# Altium PCB GateWay V1.1.PcbDoc (part 2 of 3)
Units mil, origin at the board's own origin, x right, y up, seen from the top; angles counter-clockwise.
Board outline 3543.31 x 4133.86 mil, 2 copper layers (Top Layer, Bottom Layer); 174 components, 139 nets, 614 pads, 376 vias.
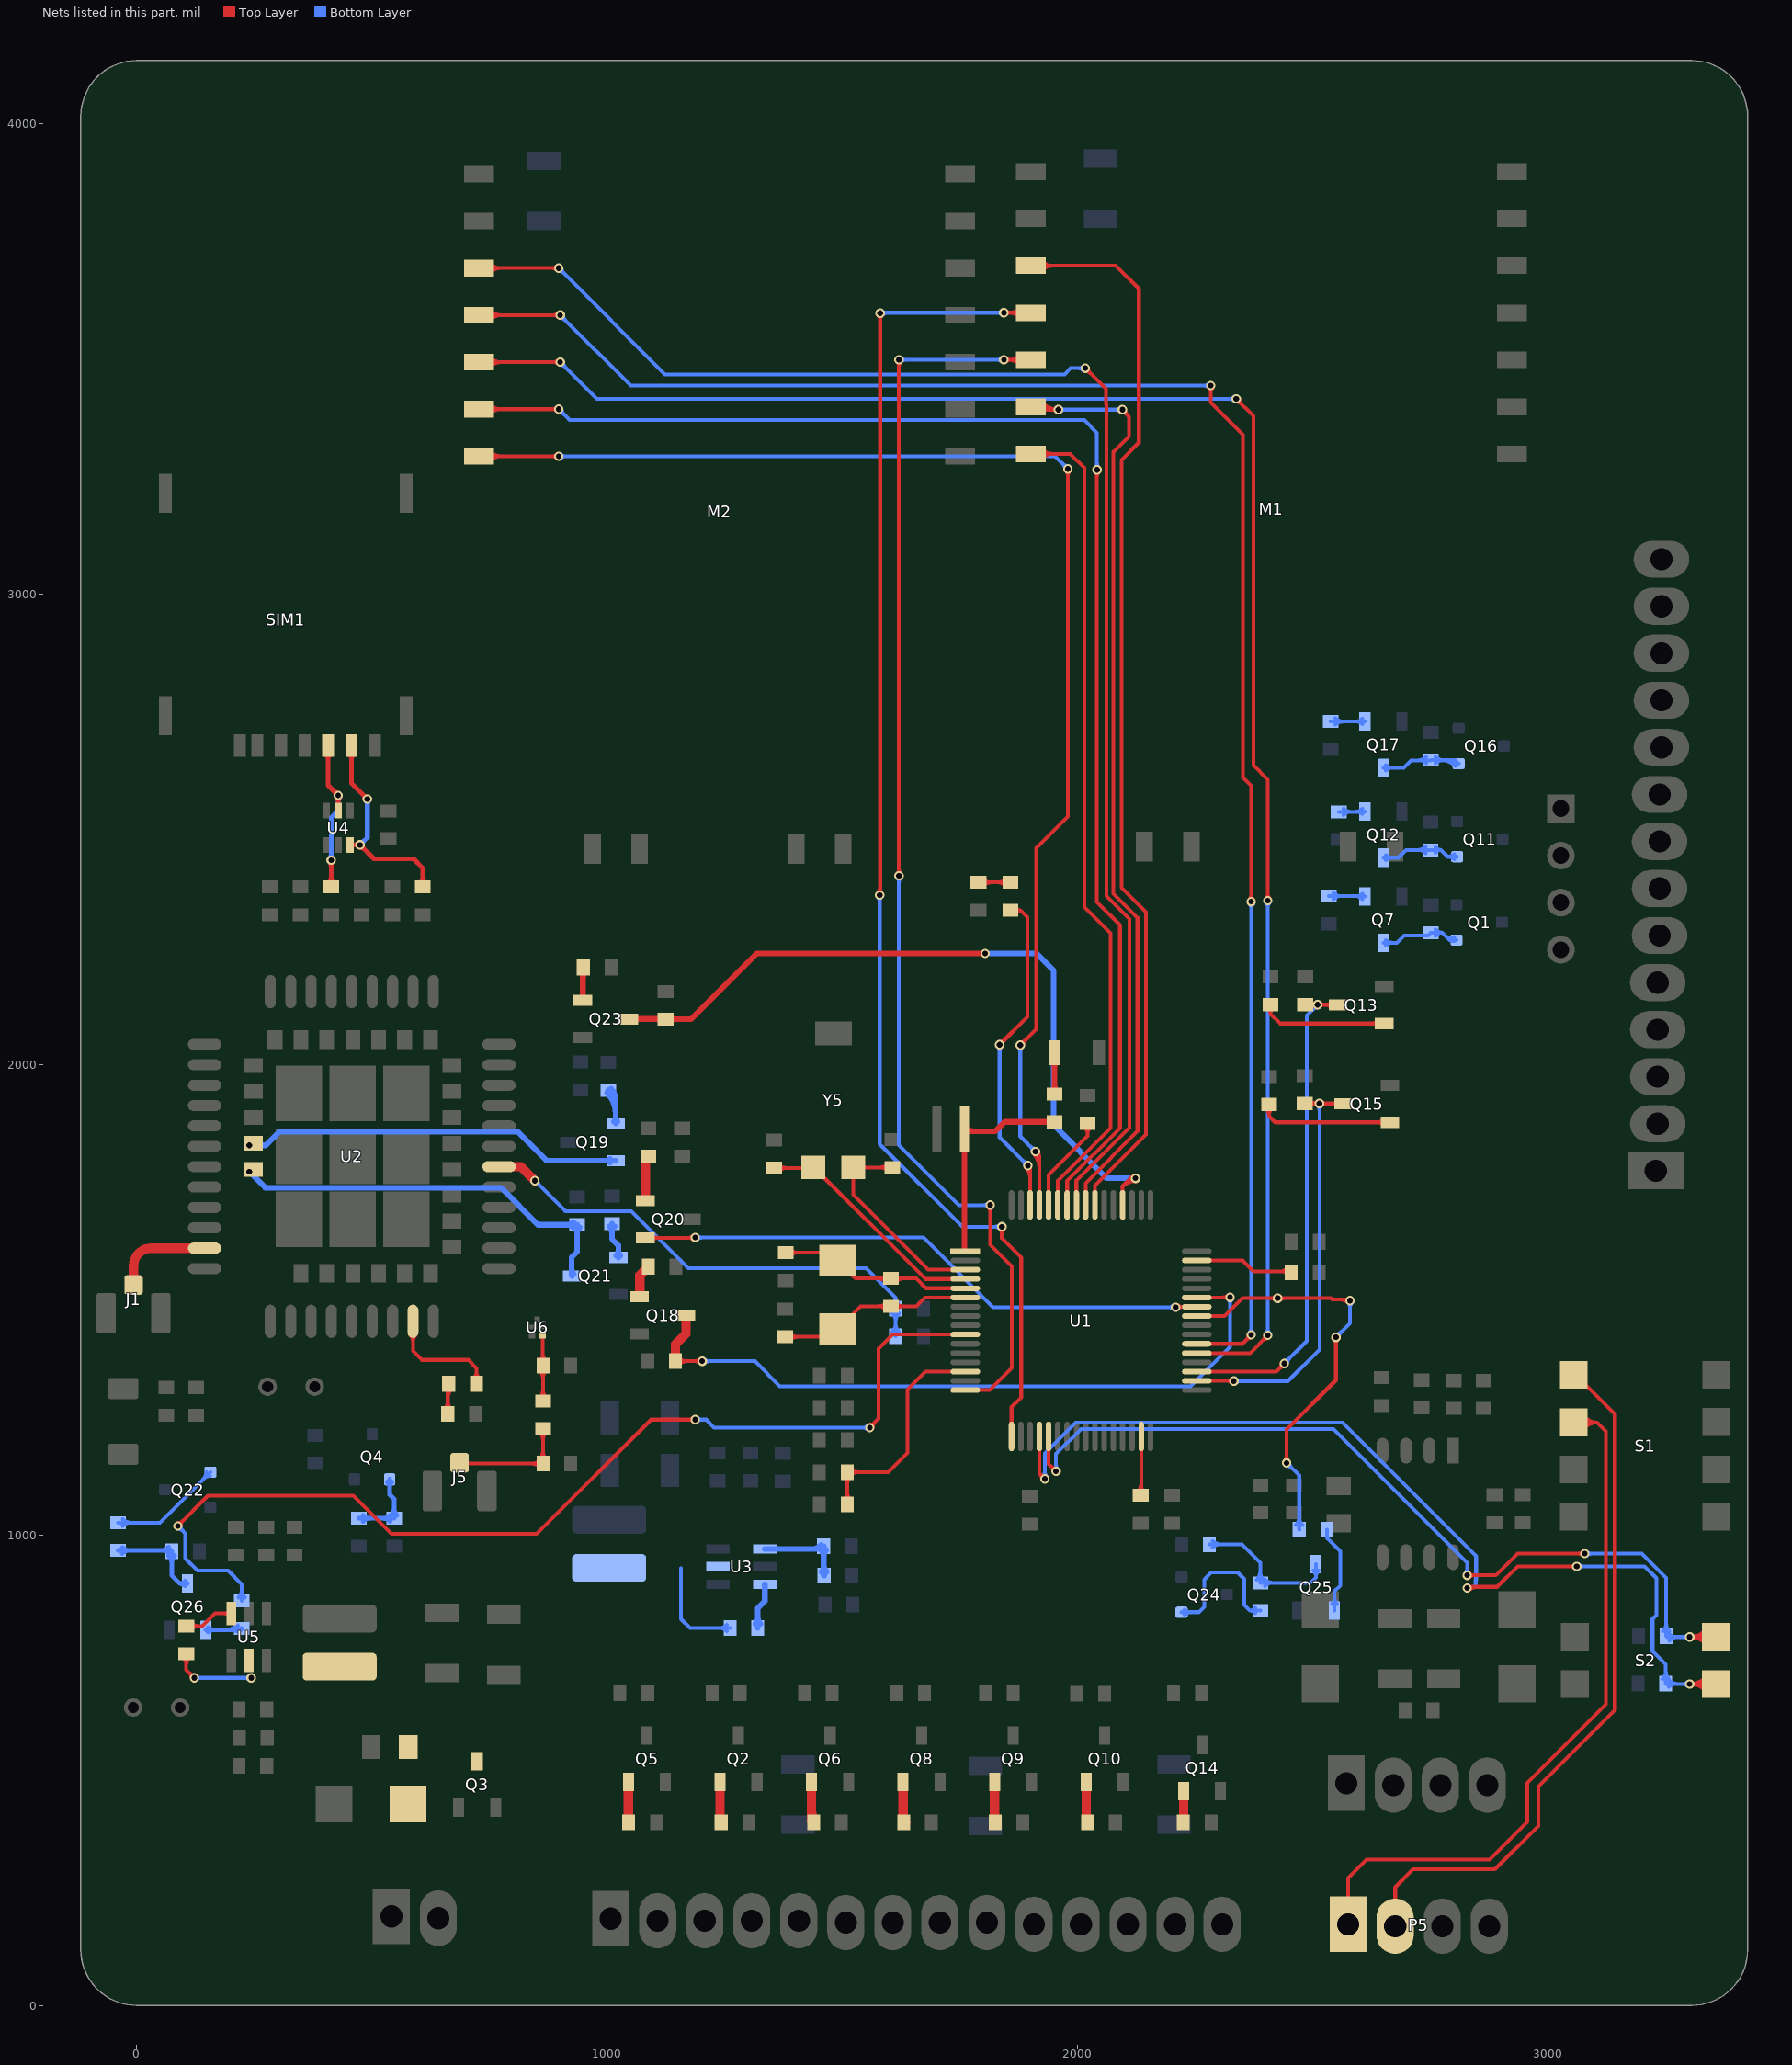
[diagram p2: the nets of this part, all layers, seen from the top]

## Via types
v1: diameter 30, hole 20, Top Layer to Bottom Layer, tented both sides, 218 vias
v2: diameter 20, hole 12, Top Layer to Bottom Layer, tented both sides, 150 vias
v3: diameter 40, hole 25, Top Layer to Bottom Layer, tented both sides, 8 vias

## Nets (pads, with @x,y where several pads share a name; then routed paths per layer and width w, separated by ;. In a path a pad name is that pad's centre, name@x,y a point inside that pad or via, vN(x,y) a via of type N, cw(c..) or ccw(c..) an arc to the next point about the centre after c; other vN are vias at no path point) (continued)
CTRL3OUT21: Q15.3 R28.1 U1.34 | length 1074.6
  Top Layer w8: U1.34@2254.13,1327.41 v2@2332.59,1327.41 ; 2317.53,1327.41 cw(c2317.53,1311.53) v2@2328.76,1322.76 ; 2319.5,1327.41 ccw(c2319.5,1340.5) v2@2328.76,1331.24 ; R28.1@2483.68,1917 v2(2515,1917) 2565.57,1917 Q15.3@2566.26,1916.32 ; R28.1@2493.55,1910.08 cw(c2510.25,1893.39) 2510.25,1917 cw(c2510.25,1940.61) R28.1@2493.55,1923.92 ; v2@2510.76,1912.76 ccw(c2500.51,1902.51) 2500.51,1917 ccw(c2500.51,1931.49) v2@2510.76,1921.24 ; v2@2519.24,1912.76 cw(c2529.49,1902.51) 2529.49,1917 cw(c2529.49,1931.49) v2@2519.24,1921.24 ; 2537.87,1917 cw(c2537.87,1895.8) Q15.3@2552.86,1910.79 ; 2541.18,1917 ccw(c2541.18,1933.52) Q15.3@2552.86,1921.84
  Bottom Layer w8: v2(2333,1327) 2448,1327 2515,1394 v2(2515,1917) ; v2@2337.24,1322.76 cw(c2347.49,1312.51) 2347.49,1327 cw(c2347.49,1341.49) v2@2337.24,1331.24 ; v2@2510.76,1912.76 cw(c2500.51,1902.51) 2515,1902.51 cw(c2529.49,1902.51) v2@2519.24,1912.76
CTRL3OUT31: Q13.3 R22.1 U1.35 | length 1235.6
  Top Layer w8: U1.35@2254.13,1347.09 2423.09,1347.09 v2(2440.26,1364.26) ; v2@2434.26,1364.26 cw(c2419.77,1364.26) 2430.02,1354.02 cw(c2440.26,1343.77) v2@2440.26,1358.26 ; R22.1@2484.68,2127 2553.63,2127 Q13.3@2554.26,2126.37 ; R22.1@2494.55,2120.08 cw(c2511.25,2103.39) 2511.25,2127 cw(c2511.25,2150.61) R22.1@2494.55,2133.92 ; v2@2506.76,2122.76 ccw(c2496.51,2112.51) 2496.51,2127 ccw(c2496.51,2141.49) v2@2506.76,2131.24 ; v2@2515.24,2122.76 cw(c2525.49,2112.51) 2525.49,2127 cw(c2525.49,2141.49) v2@2515.24,2131.24 ; 2526.01,2127 cw(c2526.01,2105.99) Q13.3@2540.86,2120.85 ; 2529.05,2127 ccw(c2529.05,2143.71) Q13.3@2540.86,2131.89
  Bottom Layer w8: v2(2440.26,1364.26) 2488,1412 2488,2104 v2(2511,2127) ; v2@2440.26,1370.26 ccw(c2440.26,1384.74) 2450.5,1374.5 ccw(c2460.74,1364.26) v2@2446.26,1364.26 ; v2@2505,2127 cw(c2490.51,2127) 2500.76,2116.76 cw(c2511,2106.51) v2@2511,2121
DTR: R59.2 R60.1 U2.6 | length 1282
  Top Layer w20: U2.6@770.98,1782.73 817.28,1782.73 v2(847,1753)
  Bottom Layer w8: v2@847,1747 cw(c847,1732.51) 857.24,1742.76 cw(c867.49,1753) v2@853,1753 ; v2(847,1753) 912,1688 1052,1688 1173,1567 1385,1567 1551,1567 1614,1504 ; R60.1@1607.98,1491.66 ccw(c1598.34,1504) 1614,1504 ; R59.2@1613.94,1422 1614,1422.06 R60.1@1614,1481 ; 1614,1439 1614,1504 ; R60.1@1620.02,1491.66 cw(c1629.66,1504) 1614,1504 ; 1614,1454.44 cw(c1637.61,1454.44) 1620.92,1471.13 ccw(c1637.61,1454.44) 1614,1454.44 ; 1614,1454.44 ccw(c1590.39,1454.44) 1607.08,1471.13 cw(c1590.39,1454.44) 1614,1454.44 ; R59.2@1607.03,1431.87 ccw(c1590.2,1448.7) 1614,1448.7 cw(c1590.2,1448.7) R59.2@1607.03,1431.87 ; 1614,1448.43 ccw(c1637.42,1448.43) 1620.86,1431.87 cw(c1637.42,1448.43) 1614,1448.43
EN_3.3V: R67.2 U1.10 | length 2437.9
  Top Layer w8: v2(88,1019) 152,1083 461.19,1083 542.19,1002 851,1002 1094,1245 v2(1188,1245) ; v2@88,1025 ccw(c88,1039.49) 98.24,1029.24 ccw(c108.49,1019) v2@94,1019 ; v2@1183.76,1240.76 ccw(c1173.51,1230.51) 1173.51,1245 ccw(c1173.51,1259.49) v2@1183.76,1249.24 ; v2(1559,1228) 1578,1247 1578,1396 1607.83,1425.83 U1.10@1762,1425.83 ; v2@1559,1234 ccw(c1559,1248.49) 1569.24,1238.24 ccw(c1579.49,1228) v2@1565,1228
  Bottom Layer w8: v2@88,1013 cw(c88,998.51) 98.24,1008.76 cw(c108.49,1019) v2@94,1019 ; v2(88,1019) 104,1003 104,950 130,924 195,924 224,895 R67.2@224,860.06 ; R67.2@217.08,866.97 ccw(c200.39,883.66) 224,883.66 ccw(c247.61,883.66) R67.2@230.92,866.97 ; v2(1188,1245) 1211,1245 1228,1228 v2(1559,1228) ; v2@1192.24,1240.76 cw(c1202.49,1230.51) 1202.49,1245 cw(c1202.49,1259.49) v2@1192.24,1249.24 ; v2@1554.76,1223.76 ccw(c1544.51,1213.51) 1544.51,1228 ccw(c1544.51,1242.49) v2@1554.76,1232.24
EN_5V: R63.2 U1.41 | length 1116.4
  Top Layer w8: U1.41@2254.13,1465.2 2313.2,1465.2 2351,1503 v2(2426,1503) 2539,1503 2542,1500 2578,1500 v2(2580,1498) ; v2@2421.76,1498.76 ccw(c2411.51,1488.51) 2411.51,1503 ccw(c2411.51,1517.49) v2@2421.76,1507.24 ; v2@2430.24,1498.76 cw(c2440.49,1488.51) 2440.49,1503 cw(c2440.49,1517.49) v2@2430.24,1507.24 ; v2@2440.76,1157.24 ccw(c2430.51,1167.49) 2445,1167.49 ccw(c2459.49,1167.49) v2@2449.24,1157.24 ; v2(2445,1153) 2445,1224 2550,1329 v2(2550,1420) ; v2@2545.76,1415.76 cw(c2535.51,1405.51) 2550,1405.51 cw(c2564.49,1405.51) v2@2554.24,1415.76 ; 2560.69,1500 cw(c2560.69,1478.69) v2@2575.76,1493.76
  Bottom Layer w8: v2(2426,1503) v2@2430,1507 ; v2@2445,1147 cw(c2445,1132.51) 2455.24,1142.76 cw(c2465.49,1153) v2@2451,1153 ; v2(2445,1153) 2471.94,1126.06 R63.2@2471.94,1011 ; R63.2@2465.03,1020.87 ccw(c2448.33,1037.56) 2471.94,1037.56 ccw(c2495.55,1037.56) R63.2@2478.86,1020.87 ; v2(2550,1420) 2580,1450 v2(2580,1498) ; v2@2550,1426 ccw(c2550,1440.49) 2560.24,1430.24 ccw(c2570.49,1420) v2@2556,1420 ; v2@2575.76,1493.76 cw(c2565.51,1483.51) 2580,1483.51 cw(c2594.49,1483.51) v2@2584.24,1493.76
GPS_RXD: Q21.3 R47.1 U2.62 | length 931
  Bottom Layer w12: v2(240,1772) 274,1738 775,1738 853.81,1659.19 R47.1@936.98,1659.19 936.98,1601.98 925,1590 925,1551.42 Q21.3@926.1,1550.32 ; 925,1567.01 ccw(c942.79,1567.01) Q21.3@930.21,1554.43 ; R47.1@928.52,1653.69 ccw(c915.24,1640.41) 915.24,1659.19 ccw(c915.24,1677.97) R47.1@928.52,1664.69 ; R47.1@931.48,1653.69 cw(c918.19,1640.41) 936.98,1640.41 cw(c955.76,1640.41) R47.1@942.48,1653.69
GPS_TXD: Q19.2 U2.61 | length 838.5
  Bottom Layer w12: v2(240,1828) 275,1828 304,1857 810,1857 871.55,1795.45 Q19.2@1018.98,1795.45 ; Q19.2@1006.99,1791.34 ccw(c997.07,1781.42) 997.07,1795.45 ccw(c997.07,1809.48) Q19.2@1006.99,1799.56
LORA_AUX: M1.5 U1.55 | length 2341.9
  Top Layer w8: M1.5@1901.25,3697.9 2082,3697.9 2131,3648.9 2131,3322 2094,3285 2094,2376 2146,2324 2146,1851 2058,1763 ; M1.5@1924.73,3688.2 cw(c1948.15,3664.78) 1948.15,3697.9 cw(c1948.15,3731.01) M1.5@1924.73,3707.6 ; U1.55@2037.59,1701.43 2037.59,1742.59 2058,1763 ; 2050.5,1755.5 2058,1763
LORA_AUX2: M2.5 U1.57 | length 3395
  Top Layer w8: M2.5@728.25,3692.9 v2(897.9,3692.9) ; M2.5@751.73,3683.2 cw(c775.15,3659.78) 775.15,3692.9 cw(c775.15,3726.01) M2.5@751.73,3702.6 ; v2@893.65,3688.65 ccw(c883.41,3678.41) 883.41,3692.9 ccw(c883.41,3707.38) v2@893.65,3697.14 ; U1.57@1998.22,1701.43 1998.22,1753.22 2111,1866 2111,2309 2062,2358 2062,3403 2061,3404 2061,3436 v2(2017,3480) ; v2@2017,3474 cw(c2017,3459.51) 2027.24,3469.76 cw(c2037.49,3480) v2@2023,3480
  Bottom Layer w8: v2@897.9,3686.9 cw(c897.9,3672.41) 908.14,3682.65 cw(c918.38,3692.9) v2@903.9,3692.9 ; v2(897.9,3692.9) 1123.8,3467 1973,3467 1986,3480 v2(2017,3480) ; v2@2012.76,3475.76 ccw(c2002.51,3465.51) 2002.51,3480 ccw(c2002.51,3494.49) v2@2012.76,3484.24
LORA_M0: M1.1 U1.59 | length 1814.4
  Top Layer w8: M1.1@1901.25,3297.9 1985.1,3297.9 2015,3268 2015,2335 2071,2279 2071,1865 1958.85,1752.85 U1.59@1958.85,1701.43 ; M1.1@1924.73,3288.2 cw(c1948.15,3264.78) 1948.15,3297.9 cw(c1948.15,3331.01) M1.1@1924.73,3307.6
LORA_M1: M1.2 U1.56 | length 2139.2
  Top Layer w8: M1.2@1901.25,3397.9 1907.15,3392 v2(1960,3392) cw(c1960,3439.63) M1.2@1925.08,3407.23 ; M1.2@1919.22,3401.79 ccw(c1941.66,3422.61) 1941.66,3392 ; M1.2@1924.73,3388.2 cw(c1933.91,3379.02) 1933.91,3392 ; v2@1955.76,3387.76 ccw(c1945.51,3377.51) 1945.51,3392 ccw(c1945.51,3406.49) v2@1955.76,3396.24 ; U1.56@2017.91,1701.43 2017.91,1747.91 2128,1858 2128,2312 2077,2363 2077,3302 2109.95,3334.95 2109.95,3377.05 v2@2095.5,3391.5 ; v2@2096,3386 cw(c2096,3373.93) 2104.54,3382.46 ; v2@2102,3392 ccw(c2118.9,3392) 2106.95,3380.05
  Bottom Layer w8: v2(1960,3392) v2(2096,3392) ; v2@1964.24,3387.76 cw(c1974.49,3377.51) 1974.49,3392 cw(c1974.49,3406.49) v2@1964.24,3396.24 ; v2@2091.76,3387.76 ccw(c2081.51,3377.51) 2081.51,3392 ccw(c2081.51,3406.49) v2@2091.76,3396.24
LORA_M02: M2.1 U1.61 | length 3150
  Top Layer w8: M2.1@728.25,3292.9 v2(897.9,3292.9) v2@898,3293 ; M2.1@751.73,3283.2 cw(c775.15,3259.78) 775.15,3292.9 cw(c775.15,3326.01) M2.1@751.73,3302.6 ; v2@893.65,3288.65 ccw(c883.41,3278.41) 883.41,3292.9 ccw(c883.41,3307.38) v2@893.65,3297.14 ; v2(1879,2041) 1913,2075 1913,2460 1980,2527 v2(1980,3266) ; v2@1879,2047 ccw(c1879,2061.49) 1889.24,2051.24 ccw(c1899.49,2041) v2@1885,2041 ; v2@1906.87,1810.65 cw(c1876.42,1780.2) 1919.48,1780.2 ; v2(1911.11,1814.89) 1919.48,1806.52 U1.61@1919.48,1701.43 ; v2@1912.53,1816.3 cw(c1895.74,1799.51) 1919.48,1799.51 ; v2@1975.76,3261.76 cw(c1965.51,3251.51) 1980,3251.51 cw(c1994.49,3251.51) v2@1984.24,3261.76
  Bottom Layer w8: v2(897.9,3292.9) 1953.1,3292.9 v2(1980,3266) ; v2@902.14,3288.65 cw(c912.38,3278.41) 912.38,3292.9 cw(c912.38,3307.38) v2@902.14,3297.14 ; v2@1874.76,2036.76 cw(c1864.51,2026.51) 1879,2026.51 cw(c1893.49,2026.51) v2@1883.24,2036.76 ; v2(1879,2041) 1879,1847 v2(1911.11,1814.89) ; v2@1905.11,1814.89 ccw(c1890.63,1814.89) 1900.87,1825.13 ccw(c1911.11,1835.37) v2@1911.11,1820.89 ; v2@1974,3266 ccw(c1959.51,3266) 1969.76,3276.24 ccw(c1980,3286.49) v2@1980,3272
LORA_M12: M2.2 U1.58 | length 3186
  Top Layer w8: M2.2@728.25,3392.9 v2(897.9,3392.9) v2@898,3393 ; M2.2@751.73,3383.2 cw(c775.15,3359.78) 775.15,3392.9 cw(c775.15,3426.01) M2.2@751.73,3402.6 ; v2@893.65,3388.65 ccw(c883.41,3378.41) 883.41,3392.9 ccw(c883.41,3407.38) v2@893.65,3397.14 ; U1.58@1978.54,1701.43 1978.54,1752.54 2091,1865 2091,2296 2042,2345 v2(2042,3264) ; v2@2037.76,3259.76 cw(c2027.51,3249.51) 2042,3249.51 cw(c2056.49,3249.51) v2@2046.24,3259.76
  Bottom Layer w8: v2@897.9,3386.9 cw(c897.9,3372.41) 908.14,3382.65 cw(c918.38,3392.9) v2@903.9,3392.9 ; v2(897.9,3392.9) 920.8,3370 2015,3370 2042,3343 v2(2042,3264) ; v2@2037.76,3268.24 ccw(c2027.51,3278.49) 2042,3278.49 ccw(c2056.49,3278.49) v2@2046.24,3268.24
LORA_RXD: M1.3 U1.16 | length 2914
  Top Layer w8: v2@1616.76,2405.24 ccw(c1606.51,2415.49) 1621,2415.49 ccw(c1635.49,2415.49) v2@1625.24,2405.24 ; v2@1616.76,3493.76 cw(c1606.51,3483.51) 1621,3483.51 cw(c1635.49,3483.51) v2@1625.24,3493.76 ; v2(1621,2401) v2(1621,3498) ; U1.16@1762,1307.72 1813.72,1307.72 1861,1355 1861,1571 1815,1617 v2(1815,1701) ; v2@1810.76,1696.76 cw(c1800.51,1686.51) 1815,1686.51 cw(c1829.49,1686.51) v2@1819.24,1696.76 ; v2(1844,3498) 1844.1,3497.9 M1.3@1901.25,3497.9 ; v2@1848.24,3493.76 cw(c1858.24,3483.76) 1858.24,3497.9 ; v2@1848.24,3502.24 ccw(c1858.73,3512.73) 1858.73,3497.9 ; M1.3@1877.77,3488.2 ccw(c1854.36,3464.78) 1854.36,3497.9 ccw(c1854.36,3531.01) M1.3@1877.77,3507.6
  Bottom Layer w8: v2@1616.76,2396.76 cw(c1606.51,2386.51) 1621,2386.51 cw(c1635.49,2386.51) v2@1625.24,2396.76 ; v2(1621,2401) 1621,1829 1749,1701 v2(1815,1701) ; v2(1621,3498) v2(1844,3498) ; v2@1625.24,3493.76 cw(c1635.49,3483.51) 1635.49,3498 cw(c1635.49,3512.49) v2@1625.24,3502.24 ; v2@1810.76,1696.76 ccw(c1800.51,1686.51) 1800.51,1701 ccw(c1800.51,1715.49) v2@1810.76,1705.24 ; v2@1839.76,3493.76 ccw(c1829.51,3483.51) 1829.51,3498 ccw(c1829.51,3512.49) v2@1839.76,3502.24
LORA_RXD2: M2.3 U1.37 | length 4061.2
  Top Layer w8: M2.3@728.25,3492.9 v2@900.9,3492.9 ; M2.3@751.73,3483.2 cw(c775.15,3459.78) 775.15,3492.9 cw(c775.15,3526.01) M2.3@751.73,3502.6 ; 886.27,3492.9 ccw(c886.27,3507.73) v2@896.76,3497.24 ; 886.76,3492.9 cw(c886.76,3478.76) v2@896.76,3488.76 ; U1.37@2254.13,1386.46 2367.46,1386.46 v2(2405,1424) ; v2@2338,3409 cw(c2338,3394.51) 2348.24,3404.76 cw(c2358.49,3415) v2@2344,3415 ; v2(2338,3415) 2374.53,3378.47 2374.53,2636 2405,2605.53 v2(2405,2348) ; v2@2399,1424 cw(c2384.51,1424) 2394.76,1413.76 cw(c2405,1403.51) v2@2405,1418 ; v2@2400.76,2352.24 ccw(c2390.51,2362.49) 2405,2362.49 ccw(c2419.49,2362.49) v2@2409.24,2352.24
  Bottom Layer w8: v2@901,3487 cw(c901,3472.51) 911.24,3482.76 cw(c921.49,3493) v2@907,3493 ; v2(901,3493) 979,3415 v2(2338,3415) ; v2@2333.76,3410.76 ccw(c2323.51,3400.51) 2323.51,3415 ccw(c2323.51,3429.49) v2@2333.76,3419.24 ; v2@2400.76,1428.24 ccw(c2390.51,1438.49) 2405,1438.49 ccw(c2419.49,1438.49) v2@2409.24,1428.24 ; v2@2400.76,2343.76 cw(c2390.51,2333.51) 2405,2333.51 cw(c2419.49,2333.51) v2@2409.24,2343.76 ; v2(2405,1424) v2(2405,2348)
LORA_TXD: M1.4 U1.17 | length 3125.3
  Top Layer w8: v2@1575.76,2364.24 ccw(c1563.1,2376.9) 1581,2376.9 ; v2@1576.76,3592.76 cw(c1566.51,3582.51) 1581,3582.51 cw(c1595.49,3582.51) v2@1585.24,3592.76 ; v2(1580,2360) 1581,2361 v2(1581,3597) ; 1581,2372.07 ccw(c1592.07,2372.07) v2@1584.24,2364.24 ; v2@1835.76,1650.76 cw(c1825.51,1640.51) 1840,1640.51 cw(c1854.49,1640.51) v2@1844.24,1650.76 ; v2(1840,1655) 1840,1630 1881,1589 1881,1492.55 1881,1292.57 1860.43,1272 U1.17@1860.43,1209.3 ; v2(1844,3598) 1844.1,3597.9 M1.4@1901.25,3597.9 ; v2@1848.24,3593.76 cw(c1858.24,3583.76) 1858.24,3597.9 ; v2@1848.24,3602.24 ccw(c1858.73,3612.73) 1858.73,3597.9 ; M1.4@1877.77,3588.2 ccw(c1854.36,3564.78) 1854.36,3597.9 ccw(c1854.36,3631.01) M1.4@1877.77,3607.6
  Bottom Layer w8: v2@1575.76,2355.76 cw(c1565.51,2345.51) 1580,2345.51 cw(c1594.49,2345.51) v2@1584.24,2355.76 ; v2(1580,2360) 1580,1831 1756,1655 v2(1840,1655) ; v2(1581,3597) 1582,3598 v2(1844,3598) ; v2@1585.24,3592.76 cw(c1597.9,3580.1) 1597.9,3598 ; v2@1585.24,3601.24 ccw(c1593.07,3609.07) 1593.07,3598 ; v2@1835.76,1650.76 ccw(c1825.51,1640.51) 1825.51,1655 ccw(c1825.51,1669.49) v2@1835.76,1659.24 ; v2@1839.76,3593.76 ccw(c1829.51,3583.51) 1829.51,3598 ccw(c1829.51,3612.49) v2@1839.76,3602.24
LORA_TXD2: M2.4 U1.38 | length 4034.8
  Top Layer w8: M2.4@728.25,3592.9 v2@900.9,3592.9 ; M2.4@751.73,3583.2 cw(c775.15,3559.78) 775.15,3592.9 cw(c775.15,3626.01) M2.4@751.73,3602.6 ; 886.27,3592.9 ccw(c886.27,3607.73) v2@896.76,3597.24 ; 886.76,3592.9 cw(c886.76,3578.76) v2@896.76,3588.76 ; U1.38@2254.13,1406.15 2351.15,1406.15 v2(2370,1425) ; v2@2279.76,3438.76 cw(c2269.51,3428.51) 2284,3428.51 cw(c2298.49,3428.51) v2@2288.24,3438.76 ; v2(2284,3443) 2284,3407 2352,3339 2352,2610 2370,2592 v2(2370,2346) v2@2374,2350 ; v2@2364,1425 cw(c2349.51,1425) 2359.76,1414.76 cw(c2370,1404.51) v2@2370,1419 ; v2@2365.76,2350.24 ccw(c2355.51,2360.49) 2370,2360.49 ccw(c2384.49,2360.49) v2@2374.24,2350.24
  Bottom Layer w8: v2@901,3587 cw(c901,3572.51) 911.24,3582.76 cw(c921.49,3593) v2@907,3593 ; v2(901,3593) 1051,3443 v2(2284,3443) ; v2@2279.76,3438.76 ccw(c2269.51,3428.51) 2269.51,3443 ccw(c2269.51,3457.49) v2@2279.76,3447.24 ; v2@2365.76,1429.24 ccw(c2355.51,1439.49) 2370,1439.49 ccw(c2384.49,1439.49) v2@2374.24,1429.24 ; v2@2365.76,2341.76 cw(c2355.51,2331.51) 2370,2331.51 cw(c2384.49,2331.51) v2@2374.24,2341.76 ; v2(2370,1425) v2(2370,2346)
MODE1: R57.1 S2.3 U1.20 | length 2480
  Top Layer w8: U1.20@1919.48,1209.3 1919.48,1130.52 v2(1931,1119) ; v2@1925,1119 ccw(c1910.51,1119) 1920.76,1129.24 ccw(c1931,1139.49) v2@1931,1125 ; v2(2829,887) 2831.37,889.37 2892.37,889.37 2936,933 v2(3062,933) ; v2@2833.24,882.76 cw(c2849.21,866.79) 2849.21,889.37 ; v2@3057.76,928.76 ccw(c3047.51,918.51) 3047.51,933 ccw(c3047.51,947.49) v2@3057.76,937.24 ; v2@3306.24,678.76 cw(c3316.49,668.51) 3316.49,683 cw(c3316.49,697.49) v2@3306.24,687.24 ; S2.3@3338.73,666.26 ccw(c3302,634.35) v2(3302,683) ; S2.3@3338.73,699.74 cw(c3302,731.65) v2(3302,683) ; S2.3@3344.77,671.5 ccw(c3319.55,649.59) 3319.55,683 ccw(c3319.55,716.41) S2.3@3344.77,694.5 ; S2.3@3358,683 v2(3302,683)
  Bottom Layer w8: v2@1926.76,1123.24 ccw(c1916.51,1133.49) 1931,1133.49 ccw(c1945.49,1133.49) v2@1935.24,1123.24 ; v2(1931,1119) 1931,1173 1997,1239 2174,1239 ; 2200,1239 2174,1239 ; v2(2829,887) 2840,887 ; v2@2834.04,883.75 cw(c2840,879.92) 2840,887 ; v2@2834.04,890.25 ccw(c2840,894.08) 2840,887 ; v2(3062,933) 3206,933 3231,908 3231,829 3223,821 3223,753 3251,725 R57.1@3251,684 3252,683 v2(3302,683) ; v2@3066.24,928.76 cw(c3076.49,918.51) 3076.49,933 cw(c3076.49,947.49) v2@3066.24,937.24 ; R57.1@3244.08,693.87 ccw(c3227.39,710.56) 3251,710.56 ccw(c3274.61,710.56) R57.1@3257.92,693.87 ; R57.1@3257.92,677.08 cw(c3272.2,662.8) 3272.2,683 ; R57.1@3257.92,690.92 ccw(c3277.02,710.02) 3277.02,683 ; v2@3297.76,678.76 ccw(c3287.51,668.51) 3287.51,683 ccw(c3287.51,697.49) v2@3297.76,687.24 ; 2174,1239 2563.81,1239 2848,954.81 2848,905.13 2847,904.13 2847,894 2840,887
MODE2: R56.1 S2.4 U1.21 | length 2248.7
  Top Layer w8: U1.21@1939.17,1209.3 1939.17,1150.83 v2(1955,1135) ; v2@1949,1135 ccw(c1934.51,1135) 1944.76,1145.24 ccw(c1955,1155.49) v2@1955,1141 ; v2(2829,914) 2890,914 2936,960 v2(3079,960) ; v2@2833.24,909.76 cw(c2843.49,899.51) 2843.49,914 cw(c2843.49,928.49) v2@2833.24,918.24 ; v2@3074.76,955.76 ccw(c3064.51,945.51) 3064.51,960 ccw(c3064.51,974.49) v2@3074.76,964.24 ; v2@3306.24,778.76 cw(c3316.49,768.51) 3316.49,783 cw(c3316.49,797.49) v2@3306.24,787.24 ; S2.4@3338.73,766.26 ccw(c3302,734.35) v2(3302,783) ; S2.4@3338.73,799.74 cw(c3302,831.65) v2(3302,783) ; S2.4@3344.77,771.5 ccw(c3319.55,749.59) 3319.55,783 ccw(c3319.55,816.41) S2.4@3344.77,794.5 ; S2.4@3358,783 v2(3302,783)
  Bottom Layer w8: v2@1950.76,1139.24 ccw(c1940.51,1149.49) 1955,1149.49 ccw(c1969.49,1149.49) v2@1959.24,1139.24 ; v2(1955,1135) 1955,1172 2008,1225 2545,1225 2829,941 v2(2829,914) ; v2@2824.76,918.24 ccw(c2814.51,928.49) 2829,928.49 ccw(c2843.49,928.49) v2@2833.24,918.24 ; v2(3079,960) 3200.32,960 3252,908.32 R56.1@3252,785 3254,783 v2(3302,783) ; v2@3083.24,955.76 cw(c3093.49,945.51) 3093.49,960 cw(c3093.49,974.49) v2@3083.24,964.24 ; R56.1@3245.08,794.87 ccw(c3228.39,811.56) 3252,811.56 ccw(c3275.61,811.56) R56.1@3258.92,794.87 ; R56.1@3258.92,775.13 cw(c3277.91,756.14) 3277.91,783 ; R56.1@3258.92,788.96 ccw(c3273.31,803.36) 3273.31,783 ; v2@3297.76,778.76 ccw(c3287.51,768.51) 3287.51,783 ccw(c3287.51,797.49) v2@3297.76,787.24
NBIOT_RXD1: Q20.2 U1.42 | length 1354.7
  Top Layer w8: Q20.2@1081.98,1631.45 1187.45,1631.45 v2(1188,1632) ; Q20.2@1095.37,1625.93 cw(c1108.71,1612.59) 1108.71,1631.45 cw(c1108.71,1650.31) Q20.2@1095.37,1636.97 ; 1172.18,1631.45 ccw(c1172.18,1647.82) v2@1183.76,1636.24 ; 1174.85,1631.45 cw(c1174.85,1618.85) v2@1183.76,1627.76 ; v2(2209,1484) 2209.89,1484.89 U1.42@2254.13,1484.89 ; v2@2213.24,1479.76 cw(c2225.63,1467.37) U1.42@2225.63,1484.89 ; v2@2213.24,1488.24 ccw(c2221.34,1496.34) 2221.34,1484.89
  Bottom Layer w8: v2(1188,1632) 1673,1632 1821,1484 v2(2209,1484) ; v2@1192.24,1627.76 cw(c1202.49,1617.51) 1202.49,1632 cw(c1202.49,1646.49) v2@1192.24,1636.24 ; v2@2204.76,1479.76 ccw(c2194.51,1469.51) 2194.51,1484 ccw(c2194.51,1498.49) v2@2204.76,1488.24
NBIOT_TXD1: Q18.3 R42.1 U1.43 | length 1647.2
  Top Layer w8: R42.1@1145.98,1369.19 v2(1202.81,1369.19) v2@1203,1369 ; R42.1@1152.89,1362.27 cw(c1169.59,1345.58) 1169.59,1369.19 cw(c1169.59,1392.8) R42.1@1152.89,1376.1 ; v2@1198.57,1364.95 ccw(c1188.33,1354.7) 1188.33,1369.19 ccw(c1188.33,1383.67) v2@1198.57,1373.43 ; U1.43@2254.13,1504.57 2324.57,1504.57 v2(2325,1505) ; 2309.49,1504.57 ccw(c2309.49,1520.51) v2@2320.76,1509.24 ; 2311.54,1504.57 cw(c2311.54,1491.54) v2@2320.76,1500.76
  Top Layer w20: R42.1@1145.98,1369.19 1145.98,1404.98 1168.4,1427.4 Q18.3@1168.4,1466.82
  Bottom Layer w8: v2(1202.81,1369.19) 1314.81,1369.19 1368,1316 2241,1316 2325,1400 v2(2325,1505) ; v2@1207.05,1364.95 cw(c1217.3,1354.7) 1217.3,1369.19 cw(c1217.3,1383.67) v2@1207.05,1373.43 ; v2@2320.76,1500.76 cw(c2310.51,1490.51) 2325,1490.51 cw(c2339.49,1490.51) v2@2329.24,1500.76
NET_LIGHT: LED3.1 U2.41 | length 312.9
  Top Layer w8: U2.41@582.38,1424.84 cw(c569.05,1411.51) 587.91,1411.51 cw(c606.76,1411.51) U2.41@593.43,1424.84 ; U2.41@587.91,1453.98 587.91,1391.09 607,1372 705,1372 722.98,1354.02 LED3.1@722.98,1321.19 ; LED3.1@716.06,1331.06 ccw(c699.37,1347.75) 722.98,1347.75 ccw(c746.59,1347.75) LED3.1@729.89,1331.06
NetC1_2: C1.2 R34.2 U1.6 Y1.2 | length 528.9
  Top Layer w8: C1.2@1379,1420.94 1474.61,1420.94 Y1.2@1491,1437.33 1539.61,1485.94 R34.2@1604,1485.94 1657.94,1485.94 1676.57,1504.57 U1.6@1762,1504.57 ; C1.2@1388.87,1414.03 cw(c1405.56,1397.34) 1405.56,1420.94 cw(c1405.56,1444.55) C1.2@1388.87,1427.86 ; R34.2@1594.13,1479.03 ccw(c1577.44,1462.34) 1577.44,1485.94 ccw(c1577.44,1509.55) R34.2@1594.13,1492.86 ; R34.2@1613.87,1479.03 cw(c1630.56,1462.34) 1630.56,1485.94 cw(c1630.56,1509.55) R34.2@1613.87,1492.86
NetC2_2: C2.2 R34.1 U1.5 Y1.1 | length 590.6
  Top Layer w8: C2.2@1380,1600.06 1473.94,1600.06 Y1.1@1491,1583 1529,1545 R34.1@1604,1545 1658,1545 1678.74,1524.26 U1.5@1762,1524.26 ; C2.2@1389.87,1593.14 cw(c1406.56,1576.45) 1406.56,1600.06 cw(c1406.56,1623.66) C2.2@1389.87,1606.97 ; Y1.1@1503.66,1554.32 cw(c1509.14,1531.05) 1526.05,1547.95 cw(c1538.76,1560.66) Y1.1@1522.9,1569.13 ; Y1.1@1515.84,1572.89 ccw(c1528.8,1565.97) Y1.1@1518.41,1555.59 ; R34.1@1594.13,1538.08 ccw(c1577.44,1521.39) 1577.44,1545 ccw(c1577.44,1568.61) R34.1@1594.13,1551.92 ; R34.1@1613.87,1538.08 cw(c1630.56,1521.39) 1630.56,1545 cw(c1630.56,1568.61) R34.1@1613.87,1551.92
NetC7_2: C7.2 U1.31 | length 162.8
  Top Layer w8: C7.2@2128.08,1090.97 ccw(c2108.94,1110.12) 2136.02,1110.12 ; C7.2@2135,1084.06 2136.02,1085.07 U1.31@2136.02,1209.3 ; 2136.02,1105.21 ccw(c2156.16,1105.21) C7.2@2141.92,1090.97
NetC10_1: C10.1 J5.1 R17.2 | length 363.3
  Top Layer w8: J5.1@686.98,1153.23 688.82,1151.39 C10.1@864.32,1151.39 R17.2@864.32,1225.33 ; C10.1@857.4,1144.47 ccw(c840.71,1127.78) 840.71,1151.39 ccw(c840.71,1175) C10.1@857.4,1158.3 ; C10.1@857.4,1161.25 ccw(c840.71,1177.95) 864.32,1177.95 ccw(c887.93,1177.95) C10.1@871.23,1161.25 ; R17.2@857.4,1218.42 cw(c840.71,1201.72) 864.32,1201.72 cw(c887.93,1201.72) R17.2@871.23,1218.42
NetC15_2: C15.2 U1.3 Y5.1 | length 482.1
  Top Layer w8: 1580.3,1781 cw(c1580.3,1757.2) C15.2@1597.13,1774.03 ; 1580.57,1781 ccw(c1580.57,1804.42) C15.2@1597.13,1787.86 ; C15.2@1607,1780.94 1606.94,1781 Y5.1@1524,1781 1524,1723 1683.37,1563.63 U1.3@1762,1563.63
NetC19_2: C19.2 U1.47 | length 248.4
  Top Layer w8: U1.47@2254.13,1583.32 2351.68,1583.32 2375,1560 2452.94,1560 C19.2@2454.94,1558 ; 2429.03,1560 ccw(c2429.03,1586.86) C19.2@2448.03,1567.87 ; 2433.64,1560 cw(c2433.64,1539.64) C19.2@2448.03,1554.04
NetC20_2: C20.2 U1.4 Y5.2 | length 541.7
  Top Layer w8: C20.2@1356,1779.94 1437.94,1779.94 Y5.2@1439,1781 1440.38,1781 1677.44,1543.94 U1.4@1762,1543.94 ; C20.2@1365.87,1773.03 cw(c1382.56,1756.34) 1382.56,1779.94 cw(c1382.56,1803.55) C20.2@1365.87,1786.86
NetC23_1: C23.1 R17.1 U6.4 | length 250.5
  Top Layer w8: R17.1@857.4,1291.3 ccw(c840.71,1308) 864.32,1308 ccw(c887.93,1308) R17.1@871.23,1291.3 ; C23.1@857.4,1349.52 cw(c840.71,1332.82) 864.32,1332.82 cw(c887.93,1332.82) C23.1@871.23,1349.52 ; C23.1@857.4,1369.25 ccw(c842.35,1384.3) 863.64,1384.3 ; 863.64,1387.59 ccw(c889.57,1387.59) C23.1@871.23,1369.25 ; U6.4@863.64,1423.3 863.64,1360.07 C23.1@864.32,1359.39 R17.1@864.32,1284.39
NetC29_1: C29.1 L2.1 U3.2 | length 257
  Bottom Layer w8: 1158,929 1158,821 1177,802 C29.1@1262,802 ; C29.1@1255.08,795.08 ccw(c1238.39,778.39) 1238.39,802 ccw(c1238.39,825.61) C29.1@1255.08,808.92
NetC29_2: C29.2 U3.6 | length 128.7
  Bottom Layer w12: C29.2@1315.55,810.45 ccw(c1302.41,823.6) 1321,823.6 ; 1321,823.87 ccw(c1339.97,823.87) C29.2@1326.56,810.45 ; C29.2@1321.06,802 C29.2@1321.06,802 1321,844 1336,859 U3.6@1336,895
NetC35_1: C35.1 L1.1 U5.2 | length 288.6
  Top Layer w8: C35.1@99.08,740.08 cw(c82.39,723.39) 106,723.39 cw(c129.61,723.39) C35.1@112.92,740.08 ; C35.1@106,747 106,713 v2(123,696) ; v2@117,696 ccw(c102.51,696) 112.76,706.24 ccw(c123,716.49) v2@123,702 ; v2(244,696) v2@247,699
  Bottom Layer w8: v2(123,696) v2(244,696) ; v2@127.24,691.76 cw(c137.49,681.51) 137.49,696 cw(c137.49,710.49) v2@127.24,700.24 ; v2@239.76,691.76 ccw(c229.51,681.51) 229.51,696 ccw(c229.51,710.49) v2@239.76,700.24
NetC35_2: C35.2 U5.6 | length 167
  Top Layer w8: C35.2@106,806.06 140.06,806.06 167,833 U5.6@202,833 ; C35.2@115.87,799.14 cw(c132.56,782.45) 132.56,806.06 cw(c132.56,829.66) C35.2@115.87,812.97 ; U5.6@197.76,828.76 ccw(c187.51,818.51) 187.51,833 ccw(c187.51,847.49) U5.6@197.76,837.24
NetD1_2: D1.2 F2.1 Q3.3
NetD2_2: D2.2 R8.1 | length 143.5
  Top Layer w12: R8.1@1946.5,1942.5 ccw(c1933.22,1955.78) 1952,1955.78 ccw(c1970.78,1955.78) R8.1@1957.5,1942.5 ; D2.2@1946.71,2006.42 cw(c1933.93,1993.64) 1952,1993.64 ; D2.2@1951.51,2025 1952,2024.51 R8.1@1952,1937 ; 1952,1995.99 cw(c1966.74,1995.99) D2.2@1956.32,2006.42
NetJ1_1: J1.1 U2.32 | length 249.9
  Top Layer w20: J1.1@-12.87,1539.06 ccw(c-29.41,1555.59) -6.02,1555.59 ccw(c17.36,1555.59) J1.1@0.82,1539.06 ; J1.1@-6.02,1531.23 -6.02,1571.98 cw(c31.5,1572) 31.5,1609.5 U2.32@144.99,1609.5
NetLED3_2: LED3.2 R38.1 | length 139
  Top Layer w8: R38.1@655.06,1267.06 ccw(c638.37,1283.75) 661.98,1283.75 ccw(c685.59,1283.75) R38.1@668.89,1267.06 ; LED3.2@657.01,1311.32 cw(c645.01,1299.32) 661.98,1299.32 ; R38.1@661.98,1257.19 661.98,1319.24 LED3.2@663.92,1321.19 ; 661.98,1289.93 cw(c692.23,1289.93) LED3.2@670.84,1311.32
NetLED5_1: LED5.1 R65.1 | length 142.2
  Top Layer w8: R65.1@1790,2387 LED5.1@1858,2387 ; R65.1@1799.87,2380.08 cw(c1816.56,2363.39) 1816.56,2387 cw(c1816.56,2410.61) R65.1@1799.87,2393.92 ; LED5.1@1848.13,2380.08 ccw(c1831.44,2363.39) 1831.44,2387 ccw(c1831.44,2410.61) LED5.1@1848.13,2393.92
NetLED5_2: LED5.2 U1.62 | length 821
  Top Layer w8: v2(1835,2042) 1894,2101 1894,2313 1879.06,2327.94 ; v2@1835,2048 ccw(c1835,2062.49) 1845.24,2052.24 ccw(c1855.49,2042) v2@1841,2042 ; LED5.2@1858,2327.94 1879.06,2327.94 ; LED5.2@1869.13,2322.58 cw(c1879.05,2316.08) 1879.05,2327.94 ; LED5.2@1869.13,2333.31 ccw(c1879.05,2339.81) 1879.05,2327.94 ; v2@1890.76,1780.76 cw(c1868.94,1758.94) 1899.8,1758.94 ; v2(1895,1785) 1899.8,1780.2 U1.62@1899.8,1701.43
  Bottom Layer w8: v2@1830.76,2037.76 cw(c1820.51,2027.51) 1835,2027.51 cw(c1849.49,2027.51) v2@1839.24,2037.76 ; v2(1835,2042) 1835,1845 v2(1895,1785) ; v2@1889,1785 ccw(c1874.51,1785) 1884.76,1795.24 ccw(c1895,1805.49) v2@1895,1791
NetMS621FE_2: MS621FE.2 R8.2 U1.1 | length 508.6
  Top Layer w12: U1.1@1762,1603 1760.5,1604.5 MS621FE.2@1760.5,1862 1764.5,1858 1826,1858 1845.94,1877.94 R8.2@1952,1877.94 ; MS621FE.2@1763.22,1864.72 ccw(c1779.43,1880.93) 1779.43,1858 ; R8.2@1943.55,1872.44 ccw(c1930.27,1859.16) 1930.27,1877.94 ccw(c1930.27,1896.73) R8.2@1943.55,1883.45
NetP5_1: P5.1 S1.6 | length 1614.7
  Top Layer w8: P5.1@2576,172 2576,271 2615,310 2877,310 2957,390 2957,473 3124,640 3124,1220 3105,1239 ; S1.6@3059,1239 3105,1239 ; S1.6@3069.73,1228.83 cw(c3089.47,1214.76) 3089.47,1239 cw(c3089.47,1263.24) S1.6@3069.73,1249.17 ; S1.6@3076.24,1224.18 cw(c3105,1203.69) 3105,1239 ; S1.6@3076.24,1253.82 ccw(c3105,1274.31) 3105,1239
NetP5_2: P5.2 S1.5 | length 1502.1
  Top Layer w8: P5.2@2676,168.06 2676,251 2714,289 2888,289 2980,381 2980,465 3143,628 3143,1256 S1.5@3059,1340
NetQ1_1: Q1.1 Q7.3 R31.1 | length 268.8
  Bottom Layer w8: Q7.3@2650.91,2258.57 2679.25,2258.57 2695,2274.32 2745.86,2274.32 R31.1@2751.54,2280 2776,2280 ; Q7.3@2656.43,2253.05 cw(c2669.76,2239.72) 2669.76,2258.57 cw(c2669.76,2277.43) Q7.3@2656.43,2264.1 ; R31.1@2761.86,2273.57 cw(c2776,2261.23) 2776,2280 ; R31.1@2761.86,2286.43 ccw(c2776,2298.77) 2776,2280 ; 2782.96,2273.04 ccw(c2793.18,2283.26) Q1.1@2801.06,2271.15 ; 2789.94,2266.06 ccw(c2798.68,2274.8) Q1.1@2805.43,2264.44 ; Q1.1@2806.31,2264.6 2791.4,2264.6 2776,2280
NetQ2_1: Q2.1 R1.1 | length 100.9
  Top Layer w20: 1240.6,407.14 ccw(c1258.3,407.14) R1.1@1245.78,394.63 ; Q2.1@1240.6,475 1240.6,391.51 R1.1@1243.11,389
NetQ4_1: Q4.1 R16.1 R18.1 | length 287.5
  Bottom Layer w10: R18.1@472.98,1035.19 R16.1@547.98,1035.19 547.98,1076.02 538.38,1085.62 Q4.1@538.38,1117.96 ; R18.1@482.14,1028.98 cw(c497.12,1013.99) 497.12,1035.19 cw(c497.12,1056.38) R18.1@482.14,1041.4 ; Q4.1@533.56,1112.16 cw(c521.93,1100.53) 538.38,1100.53 cw(c554.82,1100.53) Q4.1@543.19,1112.16 ; R16.1@538.82,1028.98 ccw(c523.83,1013.99) 523.83,1035.19 ccw(c523.83,1056.38) R16.1@538.82,1041.4 ; R16.1@541.77,1041.4 ccw(c526.78,1056.38) 547.98,1056.38 ccw(c569.17,1056.38) R16.1@554.18,1041.4
NetQ5_1: Q5.1 R24.1 | length 86.3
  Top Layer w20: Q5.1@1046,475 1046,389.61 R24.1@1046.61,389
NetQ6_1: Q6.1 R2.1 | length 106.8
  Top Layer w20: 1435.2,411.73 ccw(c1459.39,411.73) R2.1@1442.28,394.63 ; Q6.1@1435.2,475 1435.2,393.41 R2.1@1439.61,389
NetQ7_1: Q7.1 R3.2 | length 144.1
  Bottom Layer w8: R3.2@2534.54,2358.06 2610.48,2358.06 Q7.1@2611.54,2357 ; R3.2@2544.4,2351.14 cw(c2561.1,2334.45) 2561.1,2358.06 cw(c2561.1,2381.66) R3.2@2544.4,2364.97 ; 2590.13,2358.06 cw(c2590.13,2335.6) Q7.1@2606.01,2351.48 ; 2595.23,2358.06 ccw(c2595.23,2373.31) Q7.1@2606.01,2362.52
NetQ8_1: Q8.1 R4.1 | length 88.6
  Top Layer w20: Q8.1@1629.8,475 1629.8,395.31 R4.1@1636.11,389
NetQ9_1: Q9.1 R5.1 | length 77.8
  Top Layer w20: R5.1@1824.4,397.21 Q9.1@1824.4,475
NetQ10_1: Q10.1 R6.1 | length 91.4
  Top Layer w20: R6.1@2019,399.11 Q10.1@2019,475 ; 2019,408.59 ccw(c2038.75,408.59) R6.1@2024.78,394.63
NetQ11_1: Q11.1 Q12.3 R11.1 | length 291.9
  Bottom Layer w8: Q12.3@2650.91,2439.57 2682.25,2439.57 2698.68,2456 R11.1@2751,2456 2773,2456 ; Q12.3@2656.43,2434.05 cw(c2669.76,2420.72) 2669.76,2439.57 cw(c2669.76,2458.43) Q12.3@2656.43,2445.1 ; R11.1@2741.13,2449.08 ccw(c2724.44,2432.39) 2724.44,2456 ccw(c2724.44,2479.61) R11.1@2741.13,2462.92 ; R11.1@2761.9,2450.3 cw(c2773,2442.34) 2773,2456 ; R11.1@2761.9,2461.7 ccw(c2773,2469.66) 2773,2456 ; Q11.1@2801.26,2436.08 ccw(c2787.93,2422.74) 2787.93,2441.6 ccw(c2787.93,2460.46) Q11.1@2801.26,2447.12 ; Q11.1@2807.77,2441.6 2787.4,2441.6 2773,2456
NetQ12_1: Q12.1 R12.2 | length 122.6
  Bottom Layer w8: R12.2@2556,2537.06 2610.59,2537.06 Q12.1@2611.54,2538 ; R12.2@2565.87,2530.14 cw(c2582.56,2513.45) 2582.56,2537.06 cw(c2582.56,2560.66) R12.2@2565.87,2543.97 ; 2590.4,2537.06 ccw(c2590.4,2559.14) Q12.1@2606.01,2543.52 ; 2594.96,2537.06 cw(c2594.96,2521.42) Q12.1@2606.01,2532.48
NetQ13_1: Q13.1 R13.1 | length 327.2
  Top Layer w8: R13.1@2404.78,2119.21 cw(c2395.76,2107.32) 2410.68,2107.32 ; R13.1@2410.68,2127 2410.68,2107.32 ; R13.1@2416.59,2119.21 ccw(c2425.61,2107.32) 2410.68,2107.32 ; Q13.1@2639.29,2081.48 ccw(c2625.95,2068.14) 2625.95,2087 ccw(c2625.95,2105.86) Q13.1@2639.29,2092.52 ; Q13.1@2652.68,2087 2431,2087 2410.68,2107.32
NetQ14_1: Q14.1 R20.1 | length 66.2
  Top Layer w20: R20.1@2225.61,389 2226,389.39 Q14.1@2226,455
NetQ15_1: Q15.1 R21.1 | length 353.9
  Top Layer w8: R21.1@2400.77,1908.08 cw(c2384.08,1891.39) 2407.68,1891.39 cw(c2431.29,1891.39) R21.1@2414.6,1908.08 ; R21.1@2407.68,1915 2407.68,1890.32 2421.06,1876.94 Q15.1@2664.68,1876.94 ; Q15.1@2651.29,1871.42 ccw(c2637.95,1858.09) 2637.95,1876.94 ccw(c2637.95,1895.8) Q15.1@2651.29,1882.47
NetQ16_1: Q16.1 Q17.3 R30.1 | length 327.7
  Bottom Layer w8: Q17.3@2650.91,2630.57 2694.21,2630.57 2709.96,2646.32 2751.32,2646.32 R30.1@2752,2647 2803.37,2647 Q16.1@2810.77,2639.6 ; Q17.3@2656.43,2625.05 cw(c2669.76,2611.72) 2669.76,2630.57 cw(c2669.76,2649.43) Q17.3@2656.43,2636.1 ; 2723.8,2646.32 ccw(c2723.8,2672.24) R30.1@2742.13,2653.92 ; 2727.07,2646.32 cw(c2727.07,2625.03) R30.1@2742.13,2640.08 ; R30.1@2761.87,2640.08 cw(c2778.56,2623.39) 2778.56,2647 cw(c2778.56,2670.61) R30.1@2761.87,2653.92 ; 2773.06,2647 cw(c2773.06,2602.87) Q16.1@2804.26,2634.08 ; 2792.37,2647 cw(c2792.37,2622.19) Q16.1@2809.92,2639.73
NetQ17_1: Q17.1 R32.2 | length 139.3
  Bottom Layer w8: R32.2@2539,2729.06 2611.48,2729.06 Q17.1@2611.54,2729 ; R32.2@2548.87,2722.14 cw(c2565.56,2705.45) 2565.56,2729.06 cw(c2565.56,2752.66) R32.2@2548.87,2735.97 ; 2592.54,2729.06 cw(c2592.54,2710.01) Q17.1@2606.01,2723.48 ; 2592.81,2729.06 ccw(c2592.81,2747.72) Q17.1@2606.01,2734.52
NetQ18_1: Q18.1 R40.1 | length 113.8
  Top Layer w20: Q18.1@1069.98,1506.19 1069.98,1552.19 R40.1@1087.98,1570.19 ; 1069.98,1543.78 cw(c1089.72,1543.78) R40.1@1088.26,1563.47 ; R40.1@1076.48,1558.7 cw(c1087.98,1547.2) R40.1@1087.98,1563.46
NetQ19_1: Q19.1 R41.1 | length 176.4
  Bottom Layer w12: R41.1@1000.43,1939.69 cw(c955.65,1894.91) 1018.98,1894.91 ; R41.1@1002.98,1945.19 1018.98,1929.19 Q19.1@1018.98,1874.19 ; R41.1@1008.91,1948.17 cw(c984.62,1923.88) 1018.98,1923.88 ; Q19.1@1014.87,1878.3 ccw(c1004.95,1888.22) 1018.98,1888.22 ccw(c1033,1888.22) Q19.1@1023.08,1878.3
NetQ20_1: Q20.1 R44.1 | length 112.8
  Top Layer w20: Q20.1@1081.98,1710.19 1081.98,1799.19 R44.1@1087.98,1805.19 ; 1081.98,1788.71 cw(c1101.5,1788.71) R44.1@1087.7,1802.52
NetQ21_1: Q21.1 R45.1 | length 128.7
  Bottom Layer w12: R45.1@1005.48,1655.69 cw(c992.19,1642.41) 1010.98,1642.41 cw(c1029.76,1642.41) R45.1@1016.48,1655.69 ; R45.1@1010.98,1661.19 1010.98,1629.02 1024.53,1615.47 Q21.1@1024.53,1589.69 ; Q21.1@1020.42,1593.8 ccw(c1010.5,1603.72) 1024.53,1603.72 ccw(c1038.56,1603.72) Q21.1@1028.64,1593.8
NetQ22_1: Q22.1 R52.2 | length 307.4
  Bottom Layer w8: R52.2@-39,1026.06 49.88,1026.06 Q22.1@157.23,1133.4 ; R52.2@-29.13,1019.14 cw(c-12.44,1002.45) -12.44,1026.06 cw(c-12.44,1049.66) R52.2@-29.13,1032.97 ; 142.21,1118.39 ccw(c127.2,1133.4) Q22.1@148.43,1133.4 ; 144.59,1120.76 cw(c156.24,1109.11) Q22.1@156.24,1125.59
NetQ23_1: Q23.1 R61.1 | length 122
  Top Layer w12: R61.1@944.5,2197.55 cw(c933.63,2186.68) 949,2186.68 ; Q23.1@944.89,2140.11 ccw(c934.97,2150.03) 949,2150.03 ccw(c963.03,2150.03) Q23.1@953.11,2140.11 ; Q23.1@949,2136 949,2205 R61.1@950,2206 ; 949,2181.85 cw(c971.2,2181.85) R61.1@955.5,2197.55
NetQ23_3: Q23.3 R62.1 U1.52 | length 1770.2
  Top Layer w8: 2094.98,1739.98 cw(c2124,1710.96) v2@2124,1752 ; U1.52@2096.65,1701.43 2096.65,1741.65 2113,1758 ; 2107.5,1752.5 cw(c2114.34,1745.66) v2@2120.3,1753.28 ; 2108.64,1753.64 cw(c2124,1738.27) v2@2124,1760 ; 2113.89,1758.89 cw(c2119.95,1752.83) v2@2125.23,1759.57 ; v2@2118.96,1754.75 ccw(c2113,1750.92) 2113,1758 ; v2@2118.96,1761.25 cw(c2113,1765.08) 2113,1758 ; v2(2124,1758) 2113,1758
  Top Layer w12: Q23.3@1047.43,2096.63 1124.37,2096.63 R62.1@1125,2096 1178.95,2096 1318.95,2236 v2(1804,2236) ; Q23.3@1059.41,2092.52 cw(c1069.33,2082.6) 1069.33,2096.63 cw(c1069.33,2110.66) Q23.3@1059.41,2100.74 ; 1101.75,2096.63 cw(c1101.75,2075.7) R62.1@1116.55,2090.5 ; 1104.79,2096.63 ccw(c1104.79,2113.26) R62.1@1116.55,2101.5 ; R62.1@1133.45,2090.5 cw(c1146.73,2077.22) 1146.73,2096 cw(c1146.73,2114.78) R62.1@1133.45,2101.5
  Bottom Layer w12: v2(1804,2236) 1913,2236 1950,2199 1950,1871 2063,1758 v2(2124,1758)
NetQ24_1: Q24.1 R66.2 | length 357.4
  Bottom Layer w8: Q24.1@2221.77,835.6 2258.6,835.6 2270,847 2270,905 2285,920 2341,920 2355,906 2355,851 2367.06,838.94 ; Q24.1@2228.28,830.08 cw(c2241.61,816.74) 2241.61,835.6 cw(c2241.61,854.46) Q24.1@2228.28,841.12 ; R66.2@2378.09,833.26 ccw(c2367.06,825.39) 2367.06,838.94 ; R66.2@2378.09,844.63 cw(c2367.06,852.5) 2367.06,838.94 ; R66.2@2389,838.94 2367.06,838.94
NetQ25_1: Q25.1 R63.1 | length 218.2
  Bottom Layer w8: R63.1@2531,1011 2531,993 2559,965 2559,892 2547,880 Q25.1@2547,839 ; Q25.1@2541.48,852.4 ccw(c2528.14,865.73) 2547,865.73 ccw(c2565.86,865.73) Q25.1@2552.52,852.4
NetQ25_3: Q25.3 R64.1 R66.1 | length 459.3
  Bottom Layer w8: R64.1@2281,980 2350,980 2389,941 R66.1@2389,898 2496,898 2507.63,909.63 Q25.3@2507.63,937.43 ; R64.1@2287.92,973.08 cw(c2304.61,956.39) 2304.61,980 cw(c2304.61,1003.61) R64.1@2287.92,986.92 ; R66.1@2382.08,904.92 ccw(c2365.39,921.61) 2389,921.61 ccw(c2412.61,921.61) R66.1@2395.92,904.92 ; R66.1@2398.87,891.08 cw(c2415.56,874.39) 2415.56,898 cw(c2415.56,921.61) R66.1@2398.87,904.92 ; Q25.3@2502.11,924.03 cw(c2488.77,910.69) 2507.63,910.69 cw(c2526.49,910.69) Q25.3@2513.15,924.03
NetQ26_1: Q26.1 R67.1 | length 136.4
  Bottom Layer w10: Q26.1@148,798 221,798 R67.1@224,801 ; Q26.1@152.82,793.18 cw(c164.44,781.56) 164.44,798 cw(c164.44,814.44) Q26.1@152.82,802.82 ; 192.61,798 ccw(c192.61,829.44) R67.1@214.84,807.21 ; 207.09,798 cw(c207.09,787.05) R67.1@214.84,794.79
NetQ26_3: Q26.3 R52.1 R54.1 | length 331.5
  Bottom Layer w10: R52.1@-39,967 73,967 R54.1@75,965 75,914 92.57,896.43 ; R52.1@-29.84,960.79 cw(c-14.85,945.8) -14.85,967 cw(c-14.85,988.2) R52.1@-29.84,973.21 ; 51.5,967 ccw(c51.5,991.45) R54.1@68.79,974.16 ; 56.1,967 cw(c56.1,949.06) R54.1@68.79,961.74 ; R54.1@68.79,955.84 cw(c53.8,940.85) 75,940.85 cw(c96.2,940.85) R54.1@81.21,955.84 ; Q26.3@103.73,891.69 ccw(c92.58,880.91) 92.58,896.43 ; Q26.3@103.73,901.16 cw(c92.58,911.94) 92.58,896.43 ; Q26.3@108.63,896.43 92.57,896.43
NetR14_2: R14.2 R33.1 U1.14 | length 598.2
  Top Layer w8: R14.2@1504.08,1074.87 ccw(c1487.39,1091.56) 1511,1091.56 ccw(c1534.61,1091.56) R14.2@1517.92,1074.87 ; R33.1@1504.08,1123.38 cw(c1487.39,1106.69) 1511,1106.69 cw(c1534.61,1106.69) R33.1@1517.92,1123.38 ; R14.2@1511,1065 R33.1@1511,1133.25 1598.25,1133.25 1639,1174 1639,1309 1677.09,1347.09 U1.14@1762,1347.09 ; R33.1@1517.92,1126.33 cw(c1534.61,1109.64) 1534.61,1133.25 cw(c1534.61,1156.86) R33.1@1517.92,1140.16
NetR23_2: R23.2 SIM1.2 U4.5 | length 506
  Top Layer w10: SIM1.2@401.89,2661.07 cw(c388.58,2647.76) 407.4,2647.76 cw(c426.22,2647.76) SIM1.2@412.91,2661.07 ; SIM1.2@407.4,2678 407.4,2593.6 v2(429,2572) U4.5@429,2539.63 ; R23.2@407.77,2383.4 ccw(c392.78,2398.38) 413.98,2398.38 ccw(c435.17,2398.38) R23.2@420.18,2383.4 ; v2@410.46,2430.46 cw(c401.99,2421.99) 413.98,2421.99 ; R23.2@413.98,2377.19 v2@413.98,2434 ; 413.98,2421.87 cw(c426.13,2421.87) v2@417.54,2430.46 ; v2@424,2572 ccw(c411.93,2572) 420.46,2580.54 ccw(c429,2589.07) v2@429,2577 ; v2@425.46,2568.46 cw(c416.93,2559.93) 429,2559.93 cw(c441.07,2559.93) v2@432.54,2568.46
  Bottom Layer w10: v2@410.46,2437.54 ccw(c401.93,2446.07) 414,2446.07 ccw(c426.07,2446.07) v2@417.54,2437.54 ; v2(414,2434) 414,2524.63 428.98,2539.61 v2@428.98,2571.98 ; v2@425.46,2568.46 cw(c416.99,2559.99) 428.98,2559.99 ; 428.98,2559.87 cw(c441.13,2559.87) v2@432.54,2568.46
NetR25_2: R25.2 SIM1.7 U4.3 | length 604.2
  Top Layer w10: SIM1.7@451.89,2661.07 cw(c438.58,2647.76) 457.4,2647.76 cw(c476.22,2647.76) SIM1.7@462.91,2661.07 ; U4.3@454.57,2466.77 v2(475.23,2466.77) 505,2437 589,2437 608.98,2417.02 R25.2@608.98,2377.19 ; SIM1.7@457.4,2678 457.4,2597.6 v2(491,2564) ; v2@471.69,2463.24 ccw(c463.16,2454.7) 463.16,2466.77 ccw(c463.16,2478.84) v2@471.69,2470.31 ; v2@475.23,2461.77 cw(c475.23,2449.7) 483.76,2458.24 cw(c492.3,2466.77) v2@480.23,2466.77 ; v2@486,2564 ccw(c473.93,2564) 482.46,2572.54 ccw(c491,2581.07) v2@491,2569 ; R25.2@602.77,2383.4 ccw(c587.78,2398.38) 608.98,2398.38 ccw(c630.17,2398.38) R25.2@615.18,2383.4
  Bottom Layer w10: v2(475.23,2466.77) 491,2482.54 v2(491,2564) ; v2@475.23,2471.77 ccw(c475.23,2483.84) 483.76,2475.31 ccw(c492.3,2466.77) v2@480.23,2466.77 ; v2@487.46,2560.46 cw(c478.93,2551.93) 491,2551.93 cw(c503.07,2551.93) v2@494.54,2560.46
NetR29_2: R29.2 R48.2 U3.4 | length 273.4
  Bottom Layer w12: U3.4@1336,969.8 1454.75,969.8 R48.2@1460.94,976 1460.94,914 R29.2@1461.94,913 ; 1434.33,969.8 ccw(c1434.33,999.66) R48.2@1455.44,978.55 ; R48.2@1455.44,967.55 cw(c1442.16,954.27) 1460.94,954.27 cw(c1479.73,954.27) R48.2@1466.45,967.55 ; R29.2@1456.44,921.45 ccw(c1445.58,932.32) 1460.94,932.32 ; 1460.94,937.15 ccw(c1483.14,937.15) R29.2@1467.45,921.45
NetR35_1: R35.1 U1.60 | length 245
  Top Layer w8: U1.60@1939.17,1701.43 1939.17,1762 1939.17,1765.17 2022,1848 R35.1@2022,1875 ; R35.1@2015.08,1868.08 cw(c1998.39,1851.39) 2022,1851.39 cw(c2045.61,1851.39) R35.1@2028.92,1868.08